# Altium PCB roneCPUBoard-v9.PcbDoc (part 3 of 3)
Units mil, origin at the board's own origin, x right, y up, seen from the top; angles counter-clockwise.
Board outline 3914.93 x 3914.93 mil, 2 copper layers (Top Layer, Bottom Layer); 178 components, 153 nets, 717 pads, 391 vias.
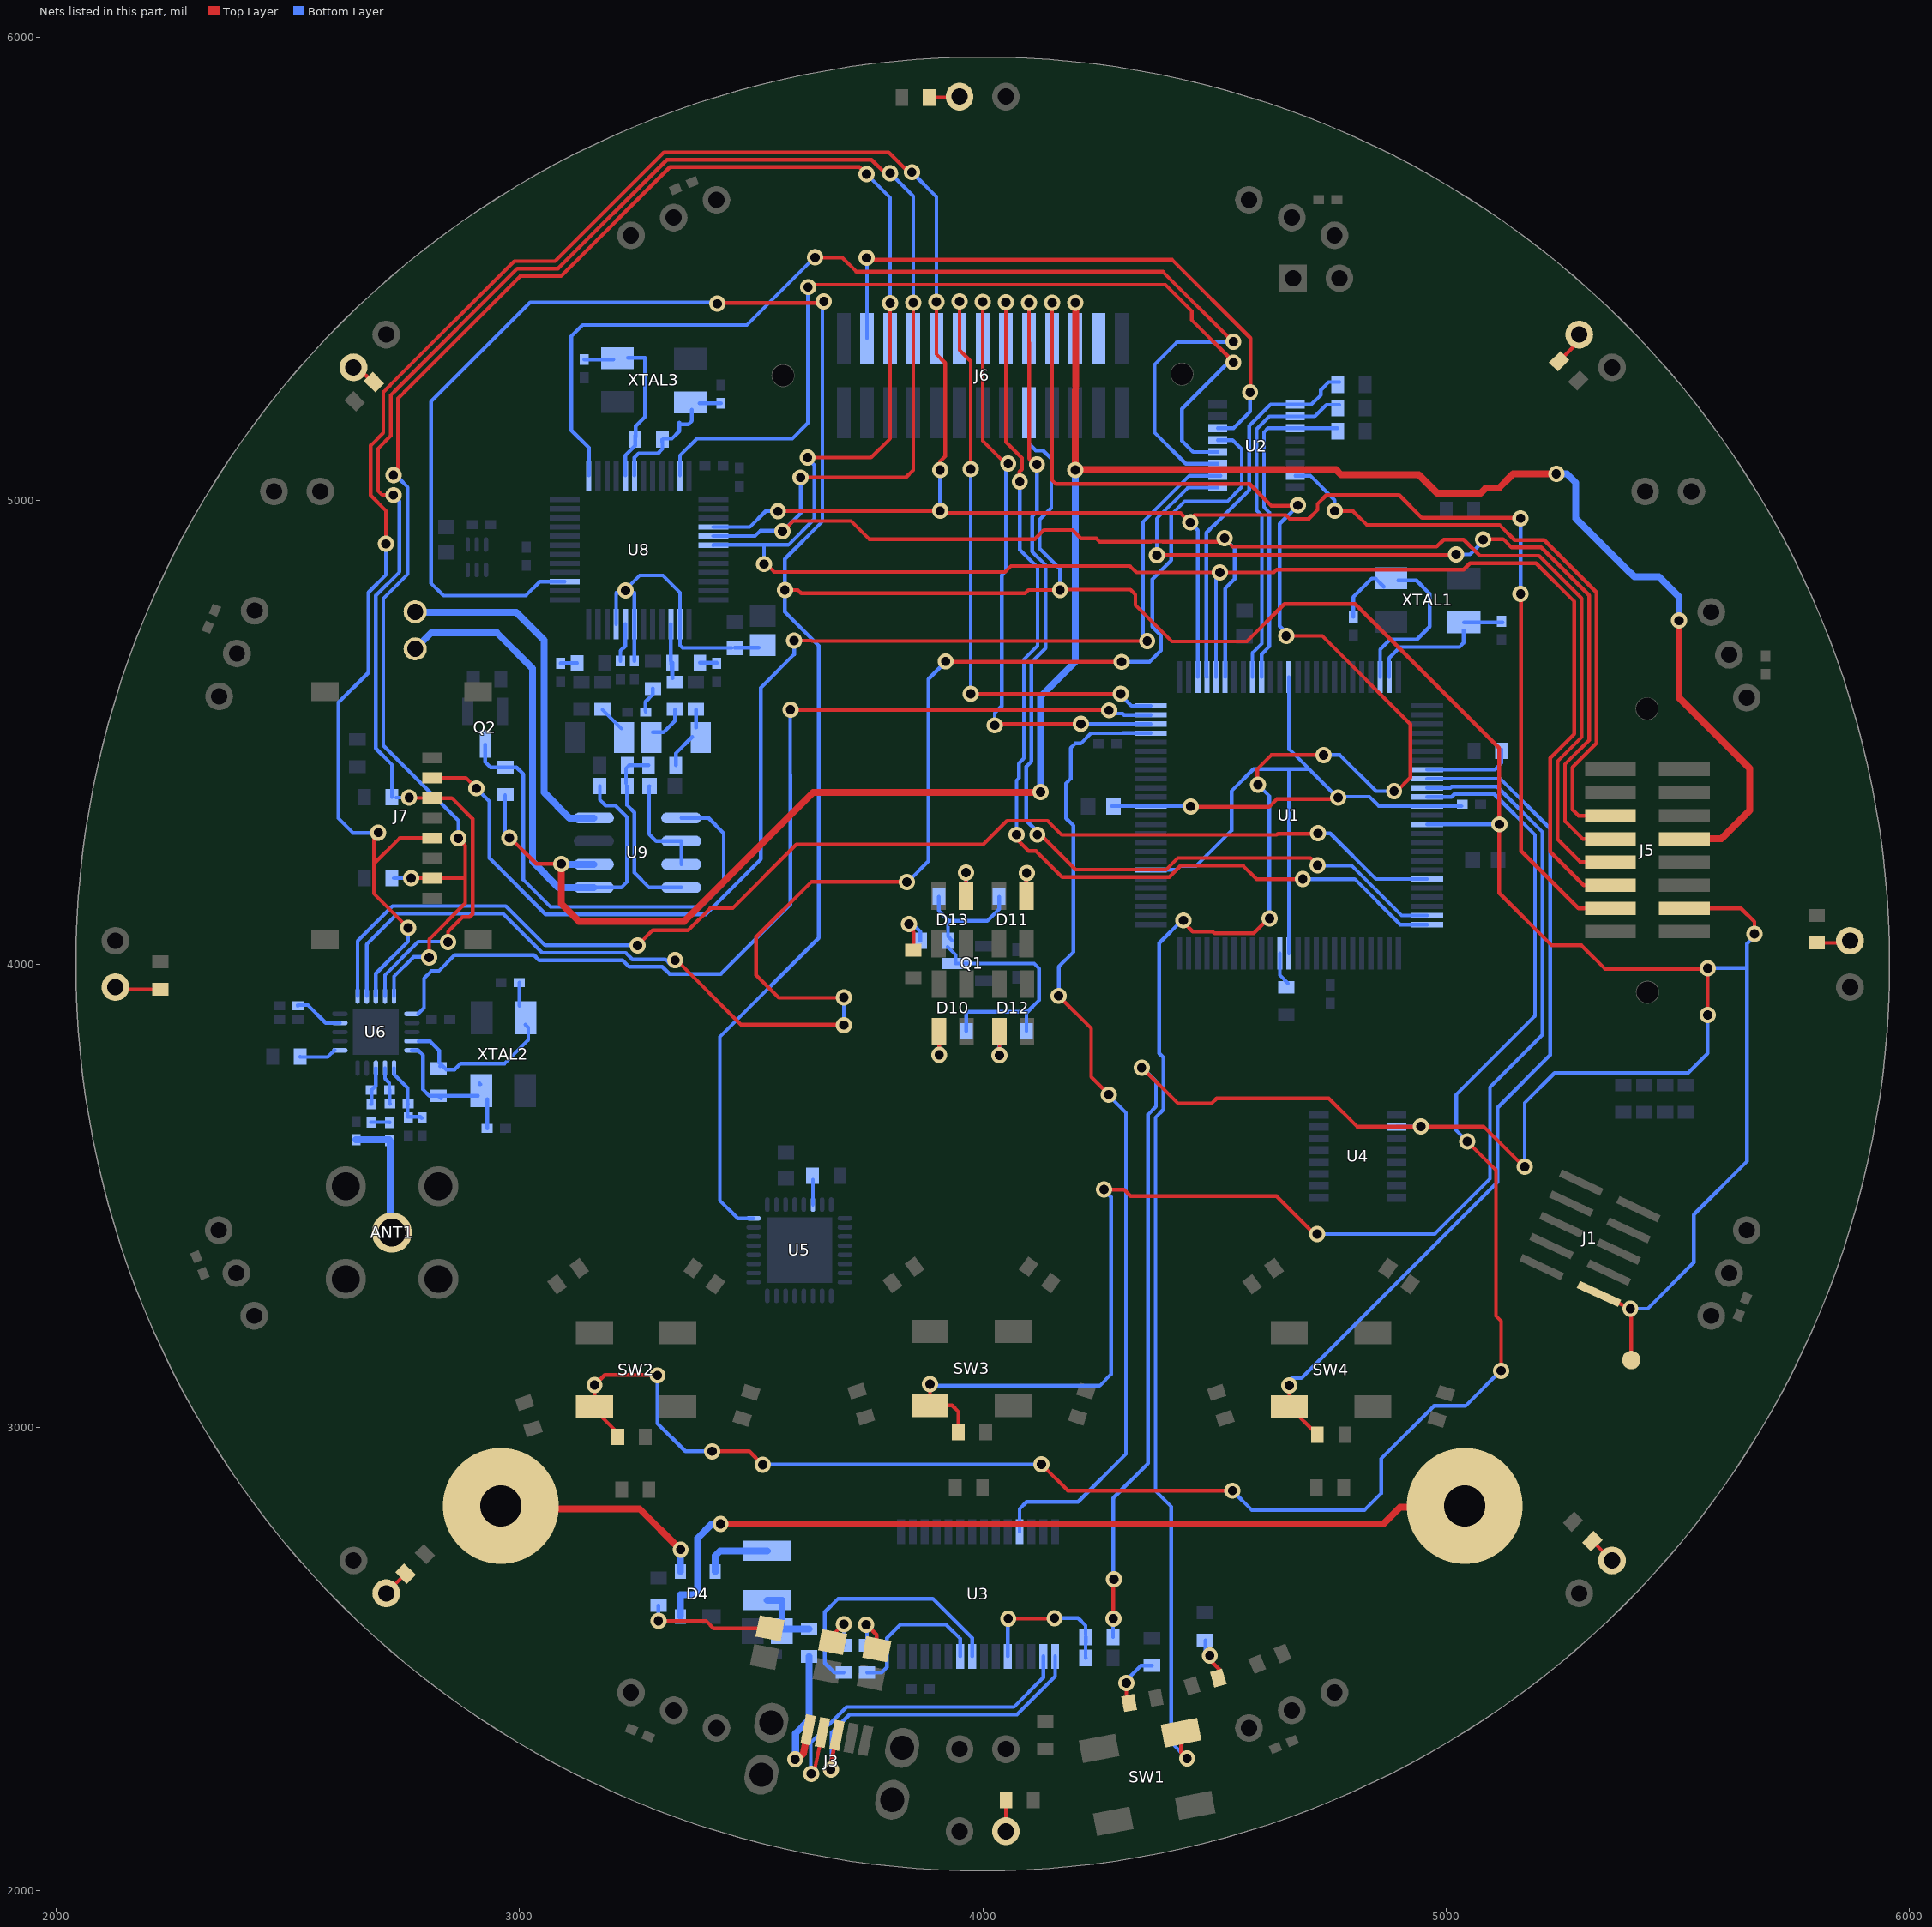
[diagram p3: the nets of this part, all layers, seen from the top]

## Via types
v1: diameter 35, hole 20, Top Layer to Bottom Layer, 374 vias
v2: diameter 25.98, hole 12.99, Top Layer to Bottom Layer, tented top, 13 vias
v3: diameter 110, hole 89, Top Layer to Bottom Layer, 2 vias
v4: diameter 250, hole 89, Top Layer to Bottom Layer, 2 vias

## Nets (pads, with @x,y where several pads share a name; then routed paths per layer and width w, separated by ;. In a path a pad name is that pad's centre, name@x,y a point inside that pad or via, vN(x,y) a via of type N, cw(c..) or ccw(c..) an arc to the next point about the centre after c; other vN are vias at no path point) (continued)
NetANT1_1: ANT1.1 C22.1 C23.2 | length 277.4
  Bottom Layer w15: C23.2@2647,3620.31 2718.69,3620.31 C22.1@2720.34,3618.66 ; C22.1@2720,3618.32 C22.1@2720.34,3618.66 ; ANT1.1@2721,3416 2721,3420.06 2721,3618 C22.1@2720.34,3618.66
NetC5_2: C5.2 U1.48 XTAL1.1 | length 471.5
  Bottom Layer w8: C5.2@4800,4748.69 4800,4792 4840,4832 4848,4832 XTAL1.1@4866,4814 ; U1.48@4857.85,4619.23 4857.85,4678.85 4879,4700 4937,4700 4965,4728 4965,4799 4936,4828 XTAL1.1@4897,4828
NetC6_2: C6.2 U1.49 XTAL1.3 | length 325.5
  Bottom Layer w8: U1.49@4877.54,4619.23 4877.54,4660.54 4901,4684 5029,4684 5038,4693 XTAL1.3@5038,4720 ; XTAL1.3@5038.74,4737.26 C6.2@5122,4737.26
NetC21_2: C21.2 U6.19 | length 107.4
  Bottom Layer w8: C21.2@2521.69,3910 2521.69,3911 2543.37,3911 2581.69,3872.69 U6.19@2612.24,3872.69
NetC22_2: C22.2 L2.2 | length 40.6
  Bottom Layer w8: L2.2@2680,3658.31 2720,3658.31 C22.2@2720,3657.69
NetC24_2: C24.2 C25.2 L4.2 U6.11 | length 150.7
  Bottom Layer w8: U6.11@2729.37,3775.24 2729.37,3761.63 2759,3732 L4.2@2759,3698 ; L4.2@2759.69,3698 L4.2@2759,3698 ; C25.2@2790,3667.69 2789,3667 2786,3670 2760,3670 2759,3670 L4.2@2759,3698
NetC26_2: C26.2 R44.1 U6.9 XTAL2.1 | length 390.2
  Bottom Layer w8: U6.9@2782,3833 2807.16,3833 2827,3813.16 2827,3786.53 R44.1@2829,3784.53 ; R44.1@2829,3779 2832,3782 2842,3772 2860,3772 2873,3785 2968,3785 3019,3836 3019,3862.48 XTAL2.1@3012.74,3868.74 ; XTAL2.1@2999.69,3909.69 C26.2@2999.69,3960
NetC27_2: C27.2 R44.2 U6.10 XTAL2.3 | length 303.4
  Bottom Layer w8: U6.10@2767.76,3813.63 2781.37,3813.63 2792,3803 2792,3729 2805.53,3715.47 XTAL2.3@2910.53,3715.47 ; R44.2@2825,3715.47 R44.2@2831,3709.47 ; XTAL2.3@2914,3740 2914,3742 XTAL2.3@2916,3740 ; C27.2@2930.31,3645 XTAL2.3@2930.31,3708.31
NetC38_1: C38.1 R45.2 | length 35.8
  Bottom Layer w8: C38.1@3089,4648.69 3089,4649 R45.2@3124.47,4649
NetC39_1: C39.1 R46.2 | length 37.8
  Bottom Layer w8: R46.2@3389.53,4650 3426,4650 C39.1@3426,4648.69
NetC40_1: C40.1 R47.2 | length 57.2
  Bottom Layer w8: C40.1@3272.69,4544 3272,4547 3272,4566 3288,4582 R47.2@3288,4594.47
NetC41_1: C41.1 R48.2 U8.18 XTAL3.1 | length 296.7
  Bottom Layer w8: U8.18@3248.16,5054.43 3248.16,5093.16 3257,5102 3299,5102 3307.5,5110.5 ; R48.2@3308,5125 3308,5132 R48.2@3308.53,5132 ; 3308.53,5111.53 R48.2@3308.53,5132 ; 3344.68,5165 3345,5165 ; 3345,5169 3345,5165 ; XTAL3.1@3372,5196 3372,5172 3365,5165 3345,5165 ; XTAL3.1@3388.68,5210.32 C41.1@3435,5210.32 ; R48.2@3308.53,5132 3310.53,5134 3329,5134 3345,5150 3345,5165
NetC42_2: C42.2 U8.44 | length 84.2
  Bottom Layer w8: C42.2@3218,4653.69 3218,4676 3228.47,4686.47 U8.44@3228.47,4733.57
NetC43_1: C43.1 R48.1 U8.17 XTAL3.3 | length 374.5
  Bottom Layer w8: C43.1@3140,5304.68 XTAL3.3@3202.68,5304.68 ; U8.17@3228.47,5054.43 3228.47,5097.47 3250,5119 R48.1@3250,5141 ; XTAL3.3@3234,5308 3271,5308 3271,5181 3251,5161 R48.1@3251,5137
NetC44_2: C44.2 R49.2 | length 58.5
  Bottom Layer w8: R49.2@3179,4549.47 3179,4549 C44.2@3220,4508
NetC45_2: C45.2 R51.2 | length 82.8
  Bottom Layer w8: C45.2@3288,4500 3311,4500 3336,4525 R51.2@3336,4549.47
NetC46_2: C46.2 U9.2 U9.3 | length 229.7
  Bottom Layer w8: C46.2@3280.44,4384 3280,4382 3280,4280 3295,4265 U9.2@3349.49,4265 U9.3@3349.49,4215
NetD1_2: D1.2 R8.2 | length 93
  Top Layer w8: v1(4490,2507) 4490,2498 4510.17,2477.83 D1.2@4510.17,2459.05
  Bottom Layer w8: R8.2@4481,2540 4481,2516 v1(4490,2507)
NetD2_1: D2.1 L1.1 R13.2 | length 149.3
  Bottom Layer w15: R13.2@3535,2626.85 3566.5,2626.85 L1.1@3566.5,2565 ; L1.1@3569,2564.53 D2.1@3625,2564.53
NetD2_2: D2.2 J3.1 | length 299.4
  Top Layer w15: v1@3601,2284 3613,2296 J3.1@3623.14,2346.91
  Bottom Layer w15: v1@3596,2287 3596,2339.04 3625,2368.04 D2.2@3625,2505.47
  other v1: 3595,2283
NetD3_2: D3.2 R14.2 | length 103.6
  Top Layer w8: v1@3749,2574 3770.96,2552.04 D3.2@3770.96,2520.93
  Bottom Layer w8: R14.2@3750,2529.53 v1@3750,2571
  other v1: 3748,2574
NetD4_4: D4.4 R13.1 | length 151
  Bottom Layer w15: D4.4@3423,2688.23 3423,2723 3433.15,2733.15 R13.1@3535,2733.15
NetD5_2: D5.2 R15.2 | length 86.8
  Top Layer w8: D5.2@3680,2542 3680,2555 v1(3700,2575)
  Bottom Layer w8: R15.2@3700,2529.53 v1(3700,2575)
NetD6_2: D6.2 R17.2 | length 285.3
  Top Layer w8: v1(3300,2582) 3300,2579 3303,2582 3402.86,2582 3418.93,2565.93 D6.2@3540.96,2565.93
  Bottom Layer w8: v1(3300,2582) R17.2@3300,2615.47
NetD7_2: D7.2 R16.2 U3.19 | length 328.2
  Top Layer w8: v1(4055,2587) 4156,2587 4157,2588 v1(4155,2588)
  Bottom Layer w8: U3.19@4053.98,2505.55 4053.98,2585.98 v1(4055,2587) ; v1(4155,2588) 4157,2588 4159,2590 4161,2588 4206,2588 4222,2572 D7.2@4222,2551 ; R16.2@4222.47,2502 4222,2502 4222,2534.53 4222.47,2535 D7.2@4222.47,2547
NetD8_2: D8.2 R18.2 | length 117
  Top Layer w8: D8.2@4310,2405 v1(4310,2448)
  Bottom Layer w8: v1(4310,2448) 4310,2453.94 4341.53,2485.47 R18.2@4365,2485.47
NetD9_2: D9.2 R19.2 | length 105.3
  Top Layer w8: v1@3839,4081 3851,4069 D9.2@3851,4032
  Bottom Layer w8: v1@3843,4092 3865.47,4069.53 R19.2@3865.47,4050
  other v1: 3841,4086
NetD10_3: D10.3 R20.2 | length 125.2
  Top Layer w8: v1@3905.94,3796.06 D10.3@3905.94,3853.82
  Bottom Layer w8: R20.2@3905.47,3855 3905.47,3796.06 3906,3796.06 v1(3906,3804)
NetD11_3: D11.3 R21.2 | length 115.7
  Top Layer w8: D11.3@4094.06,4146.18 v1@4094.06,4191.06
  Bottom Layer w8: R21.2@4094.53,4145 4094.06,4146.94 4094.06,4199.94 4095,4203 4094,4204 4092,4204 4095,4201 v1(4095,4196)
NetD12_3: D12.3 R22.2 | length 131
  Top Layer w8: v1@4035.94,3796.06 D12.3@4035.94,3853.82
  Bottom Layer w8: R22.2@4035.47,3855 4035.47,3792.47 4036,3793 v1(4036,3803)
NetD13_3: D13.3 R23.2 | length 110.9
  Top Layer w8: D13.3@3964.06,4146.18 v1@3964.06,4193.94
  Bottom Layer w8: v1(3964,4197) 3964,4201.94 3964.53,4202.47 R23.2@3964.53,4145
NetJ8_1: J8.1 R53.1 U9.5 | length 1192.1
  Bottom Layer w8: U9.5@3160.51,4165 3220,4165 3232,4177 3232,4317 3207,4342 3186,4342 3173.47,4354.53 R53.1@3173.47,4384
  Bottom Layer w15: J8.1@2775,4680 2810,4715 2951,4715 3028,4638 3028,4221 3084,4165 U9.5@3160.51,4165
NetJ8_2: J8.2 U9.8 | length 763.1
  Bottom Layer w15: J8.2@2775,4760 2775,4759 2993,4759 3053,4699 3053,4370 3108,4315 U9.8@3160.51,4315
NetL2_1: L2.1 L3.2 U6.13 | length 83
  Bottom Layer w8: L2.1@2680,3697.69 2681,3697.69 L3.2@2681,3728 ; L3.2@2680.31,3728 L3.2@2681,3728 ; U6.13@2690,3775.24 2690,3737 L3.2@2681,3728
NetL3_1: L3.1 L4.1 U6.12 | length 81.9
  Bottom Layer w8: U6.12@2709.68,3775.24 2709.68,3752.32 2719,3743 2719,3728 L3.1@2719.68,3728 2719.68,3700.32 L4.1@2720.31,3698
NetQ1_3: Q1.3 R19.1 R20.1 R21.1 R22.1 R23.1 | length 805.7
  Bottom Layer w8: R23.1@3905.47,4145 3905,4145 3905,4115 3925,4095 ; R19.1@3924,4037 3941.57,4019.43 Q1.3@3941.57,4001 4111,4001 4122,3990 4122,3922 4095,3895 ; R19.1@3934.53,4050 3925,4059.53 3925,4095 ; R20.1@3964.53,3855 3964.53,3897 4094.53,3897 R22.1@4094.53,3855 ; R21.1@4035.47,4145 4035.47,4118.47 4010,4093 3925,4093 3925,4095
NetQ2_3: Q2.3 R56.1 U9.1 | length 1051.7
  Bottom Layer w8: Q2.3@2926,4474 2926,4436 2937.47,4424.53 R56.1@2970,4424.53 2993.47,4424.53 3008.5,4409.5 3008.5,4181.5 3067,4123 3392,4123 3441,4172 3441,4282 3408,4315 U9.1@3349.49,4315
NetR1_2: R1.2 U1.89 | length 72.1
  Bottom Layer w8: U1.89@4641.31,4022.77 4641.32,3975.68 R1.2@4659,3958
NetR9_1: R9.1 U1.58 | length 195.8
  Bottom Layer w8: U1.58@4959.23,4419.43 5105.43,4419.43 5120,4434 R9.1@5120,4463
NetR14_1: R14.1 U3.23 | length 331.9
  Bottom Layer w8: R14.1@3750,2470.47 3781.47,2470.47 3793,2482 3793,2545 3822,2574 3921,2574 3951.61,2543.39 U3.23@3951.61,2505.55
NetR15_1: R15.1 U3.22 | length 564.4
  Bottom Layer w8: R15.1@3700,2470.47 3679.53,2470.47 3659,2491 3659,2601 3688,2630 3892.2,2630 3977.2,2545 U3.22@3977.2,2505.55
NetR24_1: R24.1 T1.1 | length 76.5
  Top Layer w8: R24.1@3884.53,5870 3950,5870 T1.1@3961,5870
NetR25_1: R25.1 T2.1 | length 54.4
  Top Layer w8: T2.1@2651.36,5287.64 2684.5,5254.5 2687,5252 R25.1@2685.88,5255.88
NetR26_1: R26.1 T3.1 | length 82.5
  Top Layer w8: T3.1@2142.53,3945.47 R26.1@2225,3945.47
NetR27_1: R27.1 T4.1 | length 51.1
  Top Layer w8: T4.1@2718,2648 R27.1@2754.12,2684.12
NetR28_1: R28.1 T5.1 | length 85.9
  Top Layer w8: T5.1@4050,2128 4048.26,2129.16 4047,2130 T5.1@4050.47,2133.47 ; T5.1@4050.47,2132.47 T5.1@4050.47,2133.47 ; R28.1@4050.47,2195 T5.1@4050.47,2133.47 ; T5.1@4061,2144 T5.1@4050.47,2133.47
NetR29_1: R29.1 T6.1 | length 59.6
  Top Layer w8: R29.1@5315.88,2754.12 T6.1@5358,2712
NetR30_1: R30.1 T7.1 | length 62.5
  Top Layer w8: R30.1@5800,4045.47 T7.1@5862.47,4045.47
NetR31_1: R31.1 T8.1 | length 60.6
  Top Layer w8: R31.1@5244.12,5300.88 T8.1@5287,5343.76
NetR33_2: R33.2 U5.30 | length 54.1
  Bottom Layer w8: U5.30@3633.53,3480.43 R33.2@3633.53,3534.53
NetR43_2: R43.2 U6.16 | length 81.7
  Bottom Layer w8: R43.2@2526.53,3800 2526.53,3799 2586,3799 U6.16@2601,3814
NetR50_2: R50.2 R52.2 R53.2 U9.4 | length 391.5
  Bottom Layer w8: R53.2@3230,4390 3230,4422 3234.76,4426.76 3237,4429 R52.2@3278.47,4429 ; R53.2@3232.53,4384 3232.53,4342.47 3248,4327 3248,4197 3280,4165 U9.4@3349.49,4165
POWER_BUTTON: J6.19 SW1.3 | length 4618.6
  Top Layer w8: v1(4150,5427) 4150,5044 4158,5036 4576,5036 4623,4989 v1@4680,4989 ; 4428.25,2297.75 SW1.3@4428.25,2340.57 ; v1@4437,4086 4453,4070 4496.28,4070 4500.28,4066 4585,4066 v1@4617,4098 ; v1(4594,4387) 4593,4387 4593,4421 4623,4451 v1(4736,4451) ; v1(4655,4708) 4733,4708 4923,4518 4923,4402 4895,4374 v1@4881,4374
  Bottom Layer w8: J6.19@4150,5350.02 v1(4150,5427) ; v1@4432.5,4096.5 4381,4045 4381,3807 4390,3798 4390,3685.63 4373,3668.63 4373,2862.37 4407,2828.37 4407,2319 v1(4441,2285) ; v1(4594,4387) 4619,4362 v1@4619,4100 ; v1@4655,4715 4641,4729 4641,4950 4676,4985 4680,4985 v1@4680,4992 ; v1(4736,4451) 4771,4451 4849,4373 v1(4888,4373)
  other v1: 4433,4094 4619,4098 4680,4990
POWER_EN: J6.23
PRONG1: D4.2 | length 1870.5
  Top Layer w15: v1(3434,2791) 4865,2791 4901,2827 v4@5026,2827
  Bottom Layer w15: D4.2@3347.6,2591.77 3347.6,2638.6 3377.4,2638.6 3385,2646.2 3385,2761 3415,2791 v1(3434,2791)
  other v4: 5040,2830
PRONG2: D4.3 | length 474.7
  Top Layer w15: v4(2960,2830) 2966,2824 3259,2824 v1@3347.6,2735.4
  Bottom Layer w15: D4.3@3347.6,2688.23 3347.6,2735.6 v1(3348,2736)
QEI_0A: J6.11 U1.25 | length 1341.8
  Top Layer w8: v1(3950,5430) 3950,5325 3974,5301 3974,5070 v1@3973,5069 ; v1(3974,4583) v1(4298,4583)
  Bottom Layer w8: J6.11@3950,5350.02 v1(3950,5430) ; v1(3974,4583) v1(3974,5068) ; v1(4298,4583) 4295,4583 4320.78,4557.22 U1.25@4362.77,4557.22
QEI_0B: J6.13 U1.23 | length 1366.9
  Top Layer w8: v1(4000,5429) 4000,5129 4049,5080 v1(4055,5080) ; v1@4030,4518 v1(4212,4518)
  Bottom Layer w8: J6.13@4000,5350.02 v1(4000,5429) ; v1@4029,4516 4026,4519 4026,4542 4039,4555 4040,4555 4041,4556 4041,4839 4050,4848 4050,5080 v1(4055,5080) ; v1@4213,4518 4296.85,4518 4297,4517.85 U1.23@4362.77,4517.85
  other v1: 4026,4515
QEI_1A: J6.15 U1.75 | length 2273.6
  Top Layer w8: v1(4050,5428) 4050,5126.72 4084.5,5092.22 4084.5,5067.78 4079,5062.28 v1@4079,5049 ; v1@4073,4288 4072,4288 4069,4285 4069,4274 4099,4244 4115,4244 4171.5,4187.5 4402.78,4187.5 4427.78,4212.5 4452.22,4212.5 4452.72,4212 4562,4212 4591,4183 v1(4691,4183)
  Bottom Layer w8: J6.15@4050,5350.02 v1(4050,5428) ; v1@4069,4285 4073,4289 4073,4396 4078,4401 4078,4432.63 4089,4443.63 4089,4657.2 4118.5,4686.7 4118.5,4855.5 4080,4894 v1@4080,5038 ; v1@4072,4288 v1@4073,4288 ; v1@4687,4183 v1(4691,4183) 4803.12,4183 4901.34,4084.78 U1.75@4959.23,4084.78
  other v1: 4073,4279 4080,5041
QEI_1B: J6.17 U1.74 | length 2221.9
  Top Layer w8: v1(4100,5427) 4100,5342 4100.5,5341.5 4100.5,5090.5 v1@4116,5075 ; v1(4118,4279) 4118,4285.75 4200.25,4203.5 4396.15,4203.5 4421.15,4228.5 4707.5,4228.5 v1(4723,4213)
  Bottom Layer w8: J6.17@4100,5350.02 v1(4100,5427) ; v1(4117,5078) 4117,4976 4107,4966 4107,4889.63 4136,4860.63 4136,4826.72 4135.5,4826.22 4135.5,4801.78 4136,4801.28 4136,4681.58 4105,4650.58 4105,4437 4094,4426 4094,4309.75 4118,4285.75 v1(4118,4279) ; v1@4723,4212 4796.75,4212 4904.28,4104.46 U1.74@4959.23,4104.46
RADIO_CE: U1.70 U6.1 | length 2667.8
  Top Layer w8: v1(3255,4040) 3287.5,4072.5 3364.08,4072.5 3412.08,4120.5 3460.5,4120.5 3598,4258 4001.28,4258 4052.28,4309 4140,4309 4170.5,4278.5 4634.5,4278.5 4637,4281 4714,4281 v1@4723,4272
  Bottom Layer w8: U6.1@2650.63,3930.76 2650.63,4049.63 2726,4125 2970.49,4125 3055.49,4040 v1(3255,4040) ; v1@4723,4272 4733,4282 4750,4282 4848.8,4183.2 U1.70@4959.23,4183.2
  other v1: 4724,4282
RADIO_IRQ: U1.24 U6.6 | length 2177.4
  Top Layer w8: v1(3585,4549) 3586,4548 4273.19,4548 v1(4272.69,4547.5)
  Bottom Layer w8: U6.6@2781,3892 2794,3905 2794,3969 2809.5,3984.5 2825.22,3984.5 2859.72,4019 3031.24,4019 3042.24,4008 3222.65,4008 3236.65,3994 3308.28,3994 3323.78,3978.5 3434.87,3978.5 3585,4128.63 3585,4407.28 3584.5,4407.78 3584.5,4548.5 v1(3585,4549) ; v1(4272.69,4547.5) 4279.69,4540.49 4302.04,4540.49 4305,4537.54 U1.24@4362.77,4537.54
RESET: D7.1 J1.10 J5.3 J6.18 TP1.1 U1.64 U4.10 U5.24 U8.3 | length 11399.6
  Top Layer w8: v1@3431,5427 v1@3660,5427 ; v1(3573,4807) 3601,4807 3608,4800 4067.28,4800 4091.72,4800 4098.72,4807 v1(4167,4807) ; v1@4173,4807 4174,4808 4319,4808 4329.5,4797.5 4329.5,4774.5 4408,4696 4570,4696 4651,4777 4804,4777 5115,4466 v1@5115,4302 ; v1(4282,2587) v1@4282,2670 ; v1@4343.5,3776.5 4421,3699 4494,3699 4505,3710 4747,3710 4808,3649 5081,3649 5168,3562 v1(5170,3562) ; v1(5115.31,4301.31) 5115,4301 5115,4153 5228,4040 5292.63,4040 5343.63,3989 v1@5565,3989 ; J1.10@5330.13,3287.87 v1(5398,3256) ; TP1.1@5400,3145 v1@5400,3253 ; J5.3@5538,4120 5637,4120 5666,4091 v1@5666,4066 ; v1(5565,3890) v1@5565,3989 ; v1(5565,3991) v1@5565,3989
  Bottom Layer w8: U8.3@3097.57,4825.1 3043.73,4825.1 3013.63,4795 2836,4795 2809,4822 2809,5214 3023,5428 3430,5428 v1@3431,5427 ; U5.24@3505.57,3450.9 3470.9,3450.9 3432.8,3489 3432.8,3842.8 3646,4056 3646,4686.72 3573,4759.72 3573,4874 3654,4955 v1@3654,5425 ; J6.18@4100,5189.98 4100,5123 4114.5,5108.5 4130.22,5108.5 4148,5090.72 4148,4984.37 4123,4959.37 4123,4896.25 4167,4852.25 v1@4167,4819 ; D7.1@4281.53,2547 4281.53,2586.53 v1(4282,2587) ; v1@4282,2670 4282,2847.24 4357,2922.24 4357,3675.25 4374,3692.25 4374,3747 v1@4344,3777 ; U4.10@4893.66,3648.98 v1@4947.02,3648.98 ; U1.64@4959.23,4301.31 v1(5115.31,4301.31) ; v1@5170,3564 5170,3700 5234.31,3764.31 5522.31,3764.31 5565,3807 v1(5565,3890) ; v1@5397,3255 v1@5399,3253 ; v1(5398,3256) 5435.37,3256 5535,3355.63 5535,3459 5650,3574 5650,3991 ; v1(5565,3991) 5650,3991 ; v1@5672,4066 5650,4044 5650,3991
  other v1: 4283,2672 4946,3649 4343,3776 5666,4065 3427,5425 3657,5430
RIGHT: R46.1 R51.1 U8.39 | length 150.7
  Bottom Layer w8: U8.39@3326.9,4733.57 3326.9,4655.1 3327.4,4649.72 3330.47,4616.53 R46.1@3330.47,4650
RIGHT_OUT: C45.1 R52.1 R55.2 | length 115.2
  Bottom Layer w8: R52.1@3337.53,4429 3337.53,4454.53 C45.1@3373,4490 ; C45.1@3381,4510 R55.2@3381,4549.47
SPI_CLK: J5.4 J6.9 J7.5 U1.28 U6.3 U8.28 | length 6982.1
  Top Layer w8: v1@2686,4274.19 2686,4216 ; v1(2711.5,4906.69) 2711.5,4978.5 2679,5011 2679,5119.25 2706,5146.25 2706,5233.97 2720.15,5248.12 2720.15,5248.41 2988.75,5517 3076.75,5517 3311.75,5752 3796.72,5752 3839.72,5709 v1(3847,5709) ; v1(2760,4078) 2686,4152 2686,4216 ; J7.5@2811.02,4271.57 2808.57,4271.57 2809,4272 2742,4272 2686,4216 ; v1@3558,4978 v1(3908,4978) ; v1(3900,5429) 3900,5316 3919,5297 3919,5096 3908,5085 v1(3908,5066) ; v1@3920,4977 3924,4973 4427,4973 v1@4448,4952 ; v1@4454,4966 4457,4969 4654.28,4969 4662.78,4960.5 4704,4960.5 ; 4704,4961 4723,4980 4723,4993 4742,5012 4899,5012 4948,4963 v1@5161,4963 ; v1@5162,4790 5162,4244 5286,4120 J5.4@5354.98,4120
  Bottom Layer w8: U6.3@2690,3930.76 2690,3979 2759.75,4048.75 v1@2759.75,4078 ; v1@2696,4283 2640.63,4283 2609,4314.63 2609,4564 2674,4629 2674,4801.84 2711.5,4839.34 v1(2711.5,4906.69) ; U8.28@3418.43,4943.21 3497.21,4943.21 3532,4978 v1@3569,4978 ; v1(3847,5709) 3900,5656 v1(3900,5429) J6.9@3900,5350.02 ; v1(3908,4978) v1@3919,4978 ; v1(3908,5066) 3908,4989 v1@3920,4977 ; v1@4447,4953 4464,4936 4464,4737.7 ; U1.28@4464.15,4619.23 4464.15,4736.85 ; v1(5161,4799) v1@5161,4963
  other v1: 2695.31,4283.5 4448,4953 5161,4962 3558,4977
SPI_MISO: J5.6 J6.5 J7.7 R2.2 U1.30 U6.5 U8.30 | length 6909.6
  Top Layer w8: v1(2728,5055) 2738,5065 2738,5220.72 2752.15,5234.87 2752.15,5235.15 3002,5485 3090,5485 3325,5720 3734,5720 v1(3749,5705) ; v1(2766,4185) 2883,4185 ; v1(2805,4014) 2805,4053 2883,4131 2883,4185 ; v1(2868,4271) 2883,4256 2883,4185 ; v1(3528,4863) 3533,4863 3550,4846 4048,4846 4061,4859 4317.63,4859 4331.63,4845 4509,4845 4512,4842 4513,4843 4514,4843 4516,4845 4628.49,4845 4634.49,4851 5038,4851 5052,4865 5194.25,4865 5277,4782.25 5277,4496.46 5225,4444.46 5225,4242 5297,4170 J5.6@5354.98,4170 ; v1(3622,5093) 3759,5093 3800,5134 v1(3800,5426)
  Bottom Layer w8: R2.2@2729,4185 v1(2766,4185) ; U6.5@2729.37,3930.76 2729.37,3973.12 2771.25,4015 v1@2803,4015 ; v1@2740,5056 2740,5048 2759,5029 2759,4841.58 2706,4788.58 2706,4471.63 2868,4309.63 v1(2868,4271) ; v1@2804,4013 v1(2805,4014) ; U8.30@3418.43,4903.84 3419.09,4904.5 3580.5,4904.5 3637,4961 3637,5076 3622,5091 v1(3622,5093) ; v1(3528,4863) 3528,4904 ; v1(3749,5705) 3800,5654 v1(3800,5426) J6.5@3800,5350.02 ; U1.30@4503.52,4619.23 4503.52,4832.52 4514,4843 v1(4512,4845)
SPI_MOSI: J5.8 J6.7 J7.3 R3.2 U1.31 U6.4 U8.29 | length 7054.4
  Top Layer w8: v1@2728.5,5012.5 2703.5,5012.5 2695,5021 2695,5112.63 2722,5139.63 2722,5227.35 2736.15,5241.5 2736.15,5241.78 2995.37,5501 3083.37,5501 3318.37,5736 3759.72,5736 3788.72,5707 v1(3800,5707) ; v1(2762,4359) 2758,4359 2757.19,4358.19 J7.3@2811.02,4358.19 ; J7.3@2812,4358 2854,4358 2899,4313 2899,4108 2892.18,4101.18 2877.18,4101.18 2846,4070 v1(2846,4047) ; v1@3575.86,4940.86 3591,4956 3716,4956 3755,4917 4112.28,4917 4131.78,4936.5 4194.22,4936.5 4212.22,4918.5 4245.22,4918.5 4252.72,4911 4363.28,4911 4363.78,4911.5 4388.22,4911.5 4388.72,4911 4521,4911 v1@4528.5,4918.5 ; v1(3607,5050) 3834,5050 3850,5066 v1(3850,5427) ; v1@4521,4919 4539.5,4900.5 4979.78,4900.5 4995.28,4916 5038,4916 5073,4881 5200.88,4881 5293,4788.88 5293,4489.83 5241,4437.83 5241,4269 5290,4220 J5.8@5354.98,4220
  Bottom Layer w8: U6.4@2709.68,3930.76 2709.68,3976.06 2781.63,4048 2838,4048 2841,4045 v1@2844,4048 ; R3.2@2724.53,4360 2724.53,4430.47 2690,4465 2690,4795.21 2741,4846.21 2741,4999 v1(2728,5012) ; R3.2@2734,4359 v1@2758,4359 ; v1@2757,4358 v1@2758,4359 ; v1(2762,4359) v1@2758,4359 ; U8.29@3418.43,4923.53 3508.53,4923.53 3520,4935 v1@3568,4935 ; v1@3569,4935 3607,4973 v1(3607,5050) ; v1(3800,5707) 3850,5657 v1(3850,5427) J6.7@3850,5350.02 ; v1@4521,4920 4543.5,4897.5 4543.5,4830.78 4523.2,4810.48 U1.31@4523.2,4619.23
  other v1: 4522,4919 3568,4934
SPI_SEL_A: R12.2 U1.29 U2.1 | length 821.9
  Bottom Layer w8: U1.29@4483.83,4619.23 4482.5,4620.56 4482.5,4930.5 4499.5,4947.5 4500.22,4947.5 4575,5022.28 4575,5161 4621.57,5207.57 U2.1@4674.66,5207.57 4709.57,5207.57 4730,5228 4730,5239 4747,5256 R12.2@4770,5256
SPI_SEL_AUDIO_SCI: U2.12 U8.23 | length 1952.5
  Top Layer w8: v1(3623,5461) 3628,5466 4394.37,5466 4451,5409.37 4451,5390 4541,5300 v1(4541,5298)
  Bottom Layer w8: U8.23@3346.58,5054.43 3346.58,5097.58 3383,5134 3589,5134 3623,5168 v1(3623,5461) ; U2.12@4507.34,5105.2 4453.8,5105.2 4430,5129 4430,5198 4530,5298 v1(4541,5298)
SPI_SEL_AUDIO_SDI: U2.11 U8.13 | length 2416.2
  Top Layer w8: v1(3638,5525) 3696.28,5525 3726.78,5494.5 3773.22,5494.5 3773.72,5494 4389,5494 v1@4541,5342
  Bottom Layer w8: U8.13@3149.73,5054.43 3149.73,5114.27 3112,5152 3112,5355 3136,5379 3491,5379 3638,5526 v1@3638,5529 ; v1(3638,5525) v1@3638,5529 ; v1@3638,5539 v1@3638,5529 ; U2.11@4507.34,5079.61 4438.39,5079.61 4371,5147 4371,5294 4419,5342 4526,5342 4534,5350 v1(4541,5343)
SPI_SEL_B: R11.2 U1.34 U2.2 | length 749.1
  Bottom Layer w8: U1.34@4582.26,4619.23 4582.26,4671.26 4602.5,4691.5 4602.5,4967.5 4591,4979 4591,5154.37 4618.6,5181.98 U2.2@4674.66,5181.98 4716.98,5181.98 4742,5207 R11.2@4770,5207
SPI_SEL_C: R10.2 U1.35 U2.3 | length 702.3
  Bottom Layer w8: U1.35@4601.94,4619.23 4601.94,4668.32 4618.5,4684.87 4618.5,4974.5 4607,4986 4607,5147.75 4615.64,5156.39 U2.3@4674.66,5156.39 R10.2@4765.61,5156.39
SPI_SEL_EXPAND0: J5.10 U2.9 | length 1856.8
  Top Layer w8: v1@4376,4883 v1@5023,4883 ; v1@5082,4913 5086,4917 5123.37,4917 5141.37,4899 5205.51,4899 5309,4795.51 5309,4483.2 5257,4431.2 5257,4308 5295,4270 J5.10@5354.98,4270
  Bottom Layer w8: v1(4376,4882) 4376,4961.37 4443.06,5028.43 U2.9@4507.34,5028.43 ; v1(5022,4884) 5052,4884 v1@5080,4912
  other v1: 5080,4916
SPI_SEL_EXPAND1: J5.12 U2.7 | length 1346.2
  Top Layer w8: v1(4760,4978) 4799,4978 4830,4947 5116,4947 5148,4915 5212.14,4915 5325,4802.14 5325,4476.58 5273,4424.58 5273,4333 5286,4320 J5.12@5354.98,4320
  Bottom Layer w8: U2.7@4674.66,5054.02 4706.98,5054.02 4760,5001 v1(4760,4978)
SPI_SEL_MSP430: J6.3 U2.14 | length 1306.3
  Top Layer w8: v1@3750,5513 3757,5520 4409,5520 4578,5351 v1@4578,5235
  Bottom Layer w8: J6.3@3750,5350.02 v1@3750,5513 ; U2.14@4507.34,5156.39 4541.39,5156.39 4577,5192 v1(4577,5234)
  other v1: 3749,5524
SPI_SEL_RADIO: U2.13 U6.2 | length 3623.1
  Top Layer w8: v1@3338,4009 3478,3869 3701,3869 v1(3700,3868) ; v1@3699,3927 3560,3927 3511,3976 3511,4058 3630,4177 v1(3836,4177) ; v1@3921,4652 v1(4300,4652)
  Bottom Layer w8: U6.2@2670.31,3930.76 2670.31,4042.31 2737,4109 2963.86,4109 3048.86,4024 3229.28,4024 3243.28,4010 3314.91,4010 3326.41,3998.5 v1@3343.5,3998.5 ; v1@3700,3877 v1(3700,3928) ; v1(3836,4177) 3838,4177 3883,4222 3883,4615 3921,4653 v1@3926,4653 ; v1(4300,4652) 4360,4652 4384.5,4676.5 4384.5,4709.22 4366,4727.72 4366,4830.28 4407,4871.28 4407,4969.75 4435.25,4998 4527.37,4998 4559,5029.63 4559,5111 4539.2,5130.8 U2.13@4507.34,5130.8
  other v1: 3336,4008 3920,4653
SPI_SEL_SD: J7.2 U2.10 | length 2688
  Top Layer w8: J7.2@2811.02,4401.49 2884.51,4401.49 v1(2907,4379) ; v1(3593,4698) 3630,4698 3631,4697 v1(4355,4697)
  Bottom Layer w8: v1(2907,4379) 2935,4351 2935,4228.37 3056.37,4107 3402.28,4107 3418.28,4123 3418.28,4123.28 3521,4226 3521,4596 3593,4668 v1@3593,4699 ; v1(4355,4697) 4346,4706 4346,4954 4446,5054 U2.10@4513.34,5054.02
SW_BLUE: R42.1 SW4.3 U1.59 | length 1893.3
  Top Layer w8: v1(4662,3090) SW4.3@4662,3044 R42.1@4722.24,2983.76 ; R42.1@4722.47,2984 R42.1@4722.24,2983.76 ; R42.1@4723,2983 R42.1@4722.24,2983.76
  Bottom Layer w8: v1(4662,3090) 4667,3090 4667,3106 4688,3106 5111,3529 5111,3689.63 5224.9,3803.52 5224.9,4292 5117.16,4399.74 U1.59@4959.23,4399.74
SW_GREEN: R38.1 SW3.3 U1.60 | length 2976.3
  Top Layer w8: SW3.3@3886,3047 v1(3886,3093) ; SW3.3@3887,3047 3934,3047 3947.47,3033.53 R38.1@3947.47,2989 ; v1@4262,3514 4263,3513 4305,3513 4319,3499 4634,3499 4721,3412 4722,3413 v1(4722,3417)
  Bottom Layer w8: v1@3889.5,3089.5 4252.5,3089.5 4277,3114 4277,3497 v1@4260,3514 ; v1(4722,3417) 4975.72,3417 5095,3536.28 5095,3734 5208,3847 5208,4285 5110.16,4382.84 5011.91,4382.84 5009.12,4380.06 U1.60@4959.23,4380.06
  other v1: 4262,3513
SW_RED: R34.1 SW2.3 U1.61 | length 3981.9
  Top Layer w8: SW2.3@3156,3044 R34.1@3212.47,2987.53 ; SW2.3@3162,3044 v1(3162,3091) ; v1@3163,3092 3184,3113 v1@3298,3113 ; v1(3416,2948) 3496,2948 v1(3525,2919) ; v1(4127,2920) 4184,2863 v1(4539,2863) ; v1(5046,3617) 5108,3555 5108,3240 5119,3229 v1(5119,3122)
  Bottom Layer w8: v1(3298,3112) 3298,3008 3358,2948 v1(3416,2948) ; v1(3525,2919) 3526,2920 v1(4127,2920) ; v1(4539,2863) 4581,2821 4824,2821 4860,2857 4860,2932 4974,3046 5042,3046 v1@5119,3123 ; U1.61@4959.23,4360.37 5012.06,4360.37 5018.53,4366.84 5103.53,4366.84 5192,4278.37 5192,3887.75 5022,3717.75 5022,3641 v1(5046,3617)
USB_CTS: U1.22 U3.11 | length 2120.9
  Top Layer w8: v1(4164,3931) 4234,3861 4234,3756 v1(4272,3718)
  Bottom Layer w8: U3.11@4079.57,2774.45 4079.57,2823.57 4095,2839 4205.88,2839 4309,2942.12 4309,3679 4278.5,3709.5 v1@4278.5,3718.5 ; v1@4163,3930 v1(4164,3931) 4164,3994 4196,4026 4196,4298.38 4180,4314.38 4180,4389.72 4190,4399.72 4190,4466 4200,4476 4211.72,4476 4233.72,4498 4301.3,4498 4301.46,4498.17 U1.22@4362.77,4498.17
USBDM: J3.2 U3.16 | length 766.3
  Top Layer w8: v1(3629.95,2252.03) 3638,2265 J3.2@3654.07,2340.96
  Bottom Layer w8: v1(3629.95,2252.03) 3629,2252.97 3629,2319 3706,2396 4067.37,2396 4130.75,2459.38 U3.16@4130.75,2505.55
USBDP: J3.3 U3.15 | length 722.5
  Top Layer w8: v1@3671,2269 J3.3@3685,2335
  Bottom Layer w8: v1@3674,2262 3674,2341.37 3712.63,2380 4074,2380 4156.34,2462.34 U3.15@4156.34,2505.55
  other v1: 3672,2261
VBAT: J5.9 J6.21 R56.2 U9.6 | length 4922.8
  Top Layer w8: v1@2978,4274 3036,4216 v1(3090,4216)
  Top Layer w15: v1(3090,4216) 3090,4130 3128,4092 3356,4092 3634,4370 v1@4135,4370 ; v1@4201,5423 4200,5058 4201,5057 4211,5067 4762.33,5067 4773.33,5056 4941,5056 4981,5016 5075,5016 5086,5027 5114,5027 5145,5058 v1(5238,5058) ; v1(5503,4741) 5503,4575 5656,4422 5656,4331 5595,4270 J5.9@5515.02,4270
  Bottom Layer w8: R56.2@2969,4364 2969,4281 v1(2978,4272) ; J6.21@4200,5350.02 v1(4200,5427)
  Bottom Layer w15: v1(3090,4216) 3089,4215 U9.6@3160.51,4215 ; v1@4125,4383 4125,4577 4200,4652 v1(4200,5066) ; v1@5232,5063 5237,5058 5261,5058 5280,5039 5280,4961.82 5397.82,4844 5398.67,4844 5407.17,4835.5 5459.5,4835.5 5503,4792 v1(5503,4741)
  other v1: 4125,4371
VDD25: C7.2 C8.2 U1.7 U1.14 U1.38 U1.62 U1.88 | length 1970.9
  Top Layer w8: v1(4449,4340) 4450,4339 4618,4339 4635,4356 4764,4356 v1(4767,4359)
  Bottom Layer w8: C7.2@4278.31,4340.69 U1.14@4362.77,4340.69 v1@4446.69,4340.69 ; U1.7@4362.77,4202.89 4417.89,4202.89 4426,4211 4453.72,4211 ; 4454,4211 4460,4211 4485,4236 ; 4483.5,4234.5 4485,4236 ; U1.88@4661,4022.77 4661,4421 ; 4661,4464 U1.38@4661,4619.23 ; 4661.5,4463.5 4756,4369 v1@4756,4359 ; 4704,4420.5 4584.5,4420.5 4537,4373 4537,4288 4485,4236 ; v1@4756,4357 v1@4756,4359 ; v1@4765,4361 4835,4361 4855,4341 4909.09,4341 4909.41,4340.69 U1.62@4959.23,4340.69 C8.2@5033.31,4340.69 ; v1@4773,4359 v1(4767,4359) v1@4756,4359
VDD_AUDIO: C33.1 C34.2 L5.1 U8.38 U8.43 U8.45 | length 710.6
  Bottom Layer w8: U8.45@3208.79,4733.57 3208.79,4800.79 3209.16,4800.84 ; C34.2@3248,4653.69 3248.16,4655.16 U8.43@3248.16,4733.57 3248.16,4800.84 v1@3229,4800.84 ; C33.1@3458,4682 3352,4682 3346.58,4687.42 U8.38@3346.58,4733.57 3346.58,4801.42 3309.5,4838.5 3259.5,4838.5 3229,4808 v1(3229,4806) ; C33.1@3465,4682.44 L5.1@3516.44,4682.44 ; 3209.16,4800.84 v1@3229,4800.84 ; 3209.16,4800.84 v1@3229,4800.84 ; v1@3229,4800.84 v1(3229,4806) ; v1@3229,4800.84 v1(3229,4806)
pads on no net: D10.1 D10.2 D11.1 D11.2 D12.1 D12.2 D13.1 D13.2 J1.7 J5.2 J5.13 J5.14 J5.15 J5.c1 J5.c2 J6.c1 J6.c2 J7. J7.1 J7.8 SW1.1 SW1.4 SW2.1 SW2.4 SW3.1 SW3.4 SW4.1 SW4.4 U1.16 U1.17 U1.37 U1.40 U1.43 U1.46 U1.51 U1.52 U1.53 U1.55 U2.15 U3.2 U3.3 U3.6 U3.8 U3.9 U3.10 U3.12 U3.13 U3.14 U3.24 U3.27 U3.28 U4.9 U5.12 U5.13 U5.28 U5.29 U6.21 U7.4 U7.5 U8.15 U8.27 U8.48
copper on no net:
  other v2: 2666.38,3829.38 2713.62,3829.38 2666.38,3876.62 2713.62,3876.62
  other v3: 2960,5170 5040,5170

## Polygon pours and split planes (outlines as drawn)
GND on Top Layer "Top Layer-GND" (solid, pour order 1000): 2564,3234 2942,3234 3042,3333 3042,3992 2382,3992 2382,3654.71
GND on Top Layer "Top Layer-GND" (solid, pour order 1000): 3115,4125 3452,4125 3452,4479 3577,4603 3576.72,4835 3048,4835 3048,4193
GND on Top Layer "Top Layer-GND" (solid, pour order 1000): 3497,4852.27 3497,5367 3095,5367 3095.06,5135.81 3000,5034.5 2808,5034.5 2808,4783 3032.14,4783 3031.57,4851.92

## Other copper
Top Layer:
  region net 3.3V: 4635.09,3339.88 4627,3334 4656.39,3293.55 4664.48,3299.43
  region net 3.3V: 4927,3304 4918.91,3309.88 4889.52,3269.43 4897.61,3263.55
  region net 3.3V: 4504.45,3083.55 4507.54,3074.04 4555.09,3089.49 4552,3099
  region net 3.3V: 4976.46,3014.04 4979.55,3023.55 4932,3039 4928.91,3029.49
  rectangle net 3.3V: 4717,2874 4727,2924
  region net 3.3V: 3135.09,3339.88 3127,3334 3156.39,3293.55 3164.48,3299.43
  region net 3.3V: 3427,3304 3418.91,3309.88 3389.52,3269.43 3397.61,3263.55
  region net 3.3V: 3476.46,3014.04 3479.55,3023.55 3432,3039 3428.91,3029.49
  region net 3.3V: 3007.45,3056.55 3010.54,3047.04 3058.09,3062.49 3055,3072
  rectangle net 3.3V: 3217,2874 3227,2924
  region net 3.3V: 3728.45,3086.55 3731.54,3077.04 3779.09,3092.49 3776,3102
  region net 3.3V: 3859.09,3342.88 3851,3337 3880.39,3296.55 3888.48,3302.43
  region net 3.3V: 4151,3307 4142.91,3312.88 4113.52,3272.43 4121.61,3266.55
  region net 3.3V: 4200.46,3017.04 4203.55,3026.55 4156,3042 4152.91,3032.49
Multi-Layer:
  circle w3: c4000,4000 r1957.47

## Silkscreen, mask and mechanical layers (free items; w line width, h text height)
Top Overlay:
  drawing of 2371 lines, arcs and shapes, not listed
  text "sck" at 4583,5241 h45 r90
  text "miso" at 4770,5238 h45 r90
  text "mosi" at 4685,5236 h45 r90
  text "gnd" at 4171,4986 h45 r90
  text "gyro" at 3867,4948 h45 r90
  text "FR" at 5401,4810 h90
  text "FL" at 2450,4805 h90
  text "RADIO" at 2345,4498 h90
  text "Heart" at 4903,4444 h90
  text "Beat" at 4947,4330 h90
  text "IRbeacon" at 3668,4225 h90
  text "G" at 3967,3776 h90
  text "GND" at 2554,3741 h45
  text "JTAG" at 5117,3702 h90
  text "RST" at 5497,3510 h90
  text "rone-v1.6" at 5800,3477 h45 r81.85
  text "RED" at 3123,3432 h90
  text "BLUE" at 4624,3414 h90
  text "chg" at 4362,2926 h45 r90
  text "gnd" at 3388,2908 h45
  text "P0A" at 3578,2901 h45 r90
  text "P0B" at 3656,2901 h45 r90
  text "VBAT" at 4563,2900 h45 r90
  text "VBATS" at 4470,2898 h45 r90
  text "usb" at 4631,2897 h45 r90
  text "1" at 3276,2730 h60 r90
  text "1A" at 4172,2697 h45 r90
  text "1B" at 3877,2694 h45 r90
  text "1A" at 3789,2693 h45 r90
  text "Q1B" at 4250,2652 h45 r90
  text "33V" at 4775,2648 h45 r90
  text "ON" at 4652,2510 h90
Bottom Overlay:
  circle w5: c3999,3999 r1585
  lines w10: 2879,2906 5135,2906 5135,5035 2879,5035 2879,2906
  text "8962-CPU" at 5232,4066 h90
  text "FTDI" at 4039,2520 h90
Mechanical 1:
  lines w5: 2000,4000 6000,4000 ; 4000,2000 4000,6000
  lines w10: 2790,4449 2790,4489 ; 2818.63,4361.63 2842.24,4361.63